# Altium PCB Module.PcbDoc (part 2 of 3)
Units mil, origin at the board's own origin, x right, y up, seen from the top; angles counter-clockwise.
Board outline 59055.12 x 27559.06 mil, 2 copper layers (Top Layer, Bottom Layer); 175 components, 152 nets, 576 pads, 116 vias.
Unrouted connection lines stored in the file: 153.
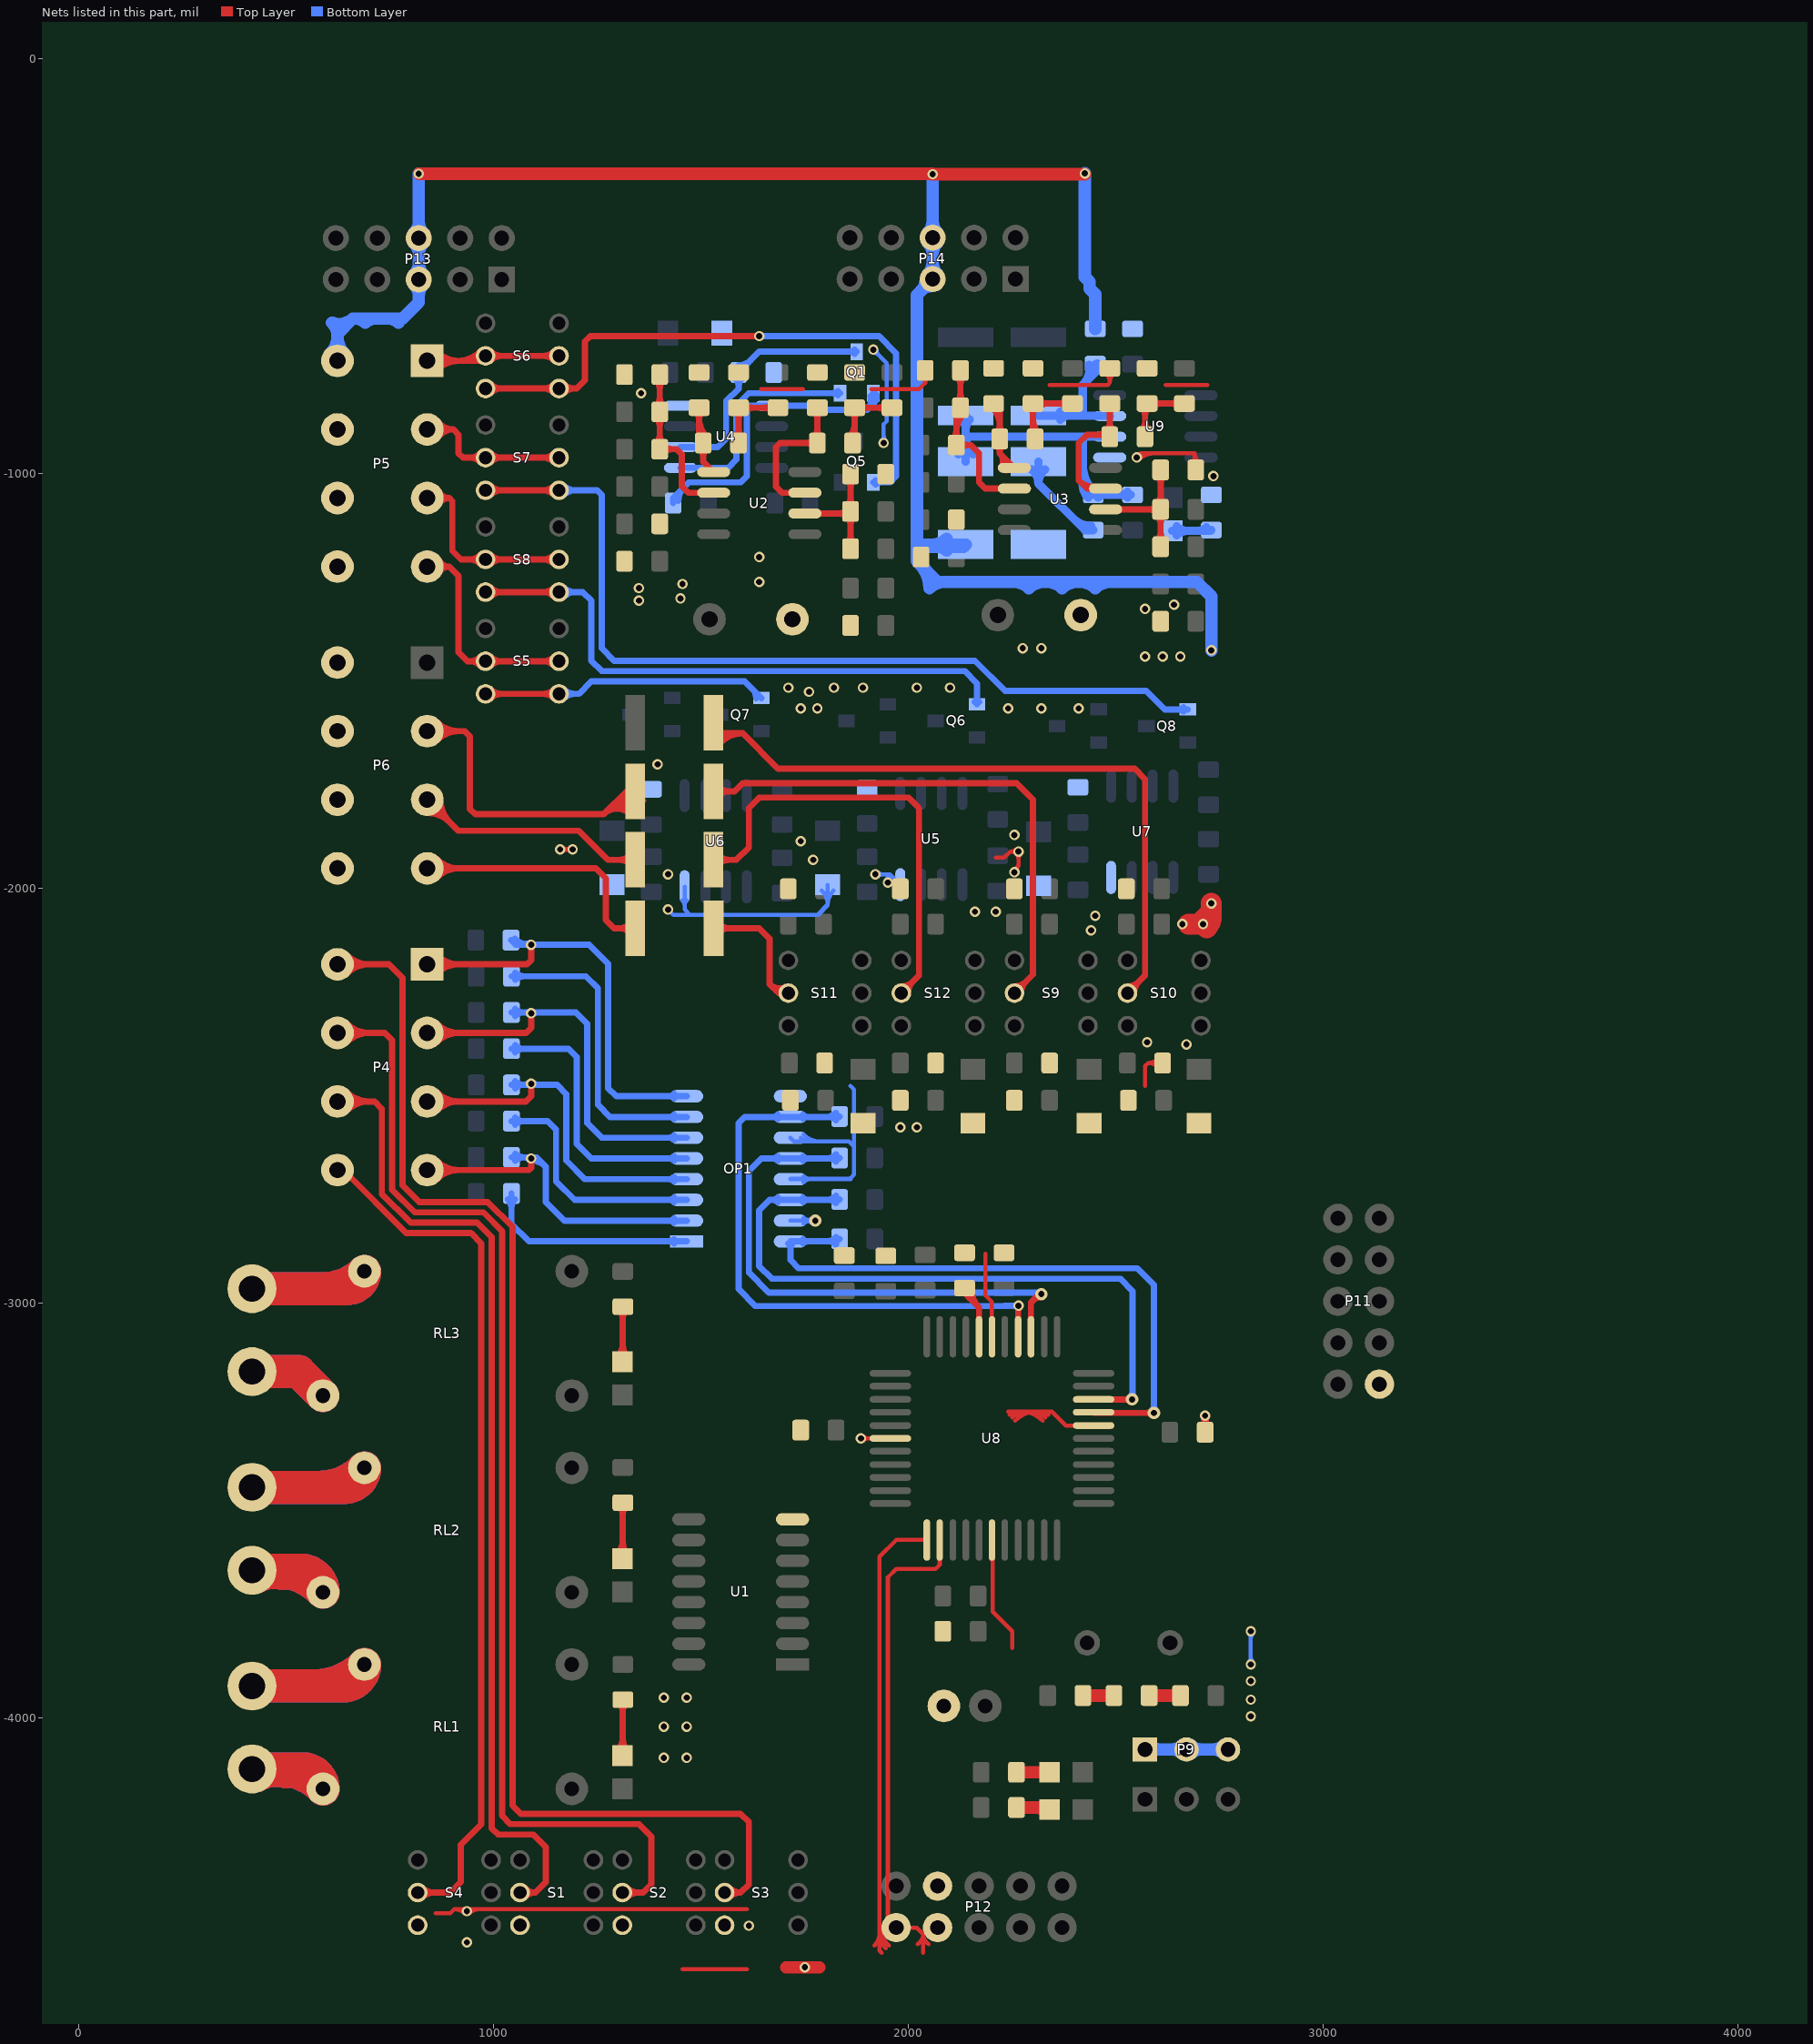
[diagram p2: the nets of this part, all layers, seen from the top]

## Via types
v1: diameter 25, hole 15, Top Layer to Bottom Layer, tented both sides, 99 vias
v2: diameter 30, hole 15, Top Layer to Bottom Layer, tented both sides, 9 vias
v3: diameter 35, hole 25, Top Layer to Bottom Layer, tented both sides, 7 vias
v4: diameter 35, hole 15, Top Layer to Bottom Layer, tented both sides, 1 vias

## Nets (pads, with @x,y where several pads share a name; then routed paths per layer and width w, separated by ;. In a path a pad name is that pad's centre, name@x,y a point inside that pad or via, vN(x,y) a via of type N, cw(c..) or ccw(c..) an arc to the next point about the centre after c; other vN are vias at no path point) (continued)
AI2: F1.1 P6.3 | length 1178.4
  Top Layer w15: P6.3@839.54,-1620.49 929.82,-1620.49 942.5,-1633.17 942.5,-1808.17 955.18,-1820.85 1264.82,-1820.85 ; P6.3@851.46,-1632.42 cw(c880.27,-1661.22) 880.27,-1620.49 cw(c880.26,-1579.77) P6.3@851.46,-1608.56 ; P6.3@862.07,-1643.03 cw(c916.48,-1697.44) 916.48,-1620.49 ; P6.3@862.07,-1597.96 ccw(c916.47,-1543.55) 916.47,-1620.49 ; 1275.54,-1810.13 cw(c1307.81,-1842.39) F1.1@1339.73,-1809.78 ; 1286.27,-1799.4 cw(c1318.42,-1831.55) F1.1@1350.22,-1799.06 ; 1296.99,-1788.68 cw(c1329.02,-1820.72) F1.1@1360.71,-1788.34 ; F1.1@1329.24,-1820.5 ccw(c1297.21,-1853.23) 1264.82,-1820.85 ; F1.1@1340.51,-1765.67 1320,-1765.67 1264.82,-1820.85
AI3: F4.1 P6.5 | length 806.9
  Top Layer w15: P6.5@839.54,-1817.72 cw(c839.54,-1894.66) 893.94,-1840.25 cw(c948.35,-1785.85) P6.5@871.41,-1785.85 ; P6.5@839.54,-1802.72 cw(c839.54,-1843.45) 868.33,-1814.65 cw(c897.13,-1785.85) P6.5@856.41,-1785.85 ; P6.5@839.54,-1785.85 914.36,-1860.67 1205,-1860.67 1275,-1930.67 F4.1@1340.51,-1930.67 ; F4.1@1329.11,-1942.07 ccw(c1301.59,-1969.59) 1301.59,-1930.67 ccw(c1301.59,-1891.75) F4.1@1329.11,-1919.27
AI4: F3.1 P6.7 | length 865.9
  Top Layer w15: P6.7@839.54,-1951.2 1245.53,-1951.2 1270,-1975.67 1270,-2075.67 1290,-2095.67 F3.1@1341.02,-2095.67 ; P6.7@851.46,-1963.13 cw(c880.26,-1991.93) 880.26,-1951.2 cw(c880.26,-1910.47) P6.7@851.46,-1939.27 ; P6.7@862.07,-1973.74 cw(c916.48,-2028.14) 916.48,-1951.2 cw(c916.48,-1874.26) P6.7@862.07,-1928.67 ; F3.1@1329.62,-2107.07 ccw(c1302.1,-2134.59) 1302.1,-2095.67 ccw(c1302.1,-2056.75) F3.1@1329.62,-2084.27
AOMA1: P5.1 S6.1 S6.4 | length 726.8
  Top Layer w15: P5.1@839.54,-727.67 968,-727.67 S6.4@980,-715.67 S6.1@1157.16,-715.67 ; P5.1@851.46,-739.6 cw(c880.26,-768.4) 880.26,-727.67 cw(c880.26,-686.94) P5.1@851.46,-715.74 ; P5.1@862.07,-750.21 cw(c916.48,-804.61) 916.48,-727.67 cw(c916.48,-650.73) P5.1@862.07,-705.13 ; 912.11,-727.67 ccw(c912.11,-647.78) S6.4@968.6,-704.27 ; 948.32,-727.67 ccw(c948.32,-683.99) S6.4@979.2,-714.88 ; S6.4@991.4,-727.07 cw(c1018.92,-754.59) 1018.92,-715.67 cw(c1018.92,-676.75) S6.4@991.4,-704.27 ; S6.1@1145.76,-727.07 ccw(c1118.24,-754.59) 1118.24,-715.67 ccw(c1118.24,-676.75) S6.1@1145.76,-704.27
AOMA2: P5.3 S7.1 S7.4 | length 641.9
  Top Layer w15: P5.3@839.54,-893.02 902.35,-893.02 ; P5.3@865.25,-911.85 cw(c902.35,-938.99) 902.35,-893.02 ; P5.3@865.25,-874.2 ccw(c902.35,-847.05) 902.35,-893.02 ; S7.4@968.6,-972.49 ccw(c941.08,-1000.01) 941.08,-961.09 ccw(c941.08,-922.17) S7.4@968.6,-949.69 ; S7.4@991.4,-972.49 cw(c1018.92,-1000.01) 1018.92,-961.09 cw(c1018.92,-922.17) S7.4@991.4,-949.69 ; S7.1@1145.77,-972.49 ccw(c1118.24,-1000.01) 1118.24,-961.09 ccw(c1118.24,-922.17) S7.1@1145.77,-949.69 ; S7.1@1157.17,-961.09 S7.4@980,-961.09 925.42,-961.09 915,-950.67 915,-905.67 902.35,-893.02
AOMA3: P5.5 S8.1 S8.4 | length 694.1
  Top Layer w15: P5.5@839.54,-1058.38 892.71,-1058.38 ; P5.5@867.64,-1073.4 cw(c892.71,-1086.8) 892.71,-1058.38 ; P5.5@867.64,-1043.36 ccw(c892.71,-1029.96) 892.71,-1058.38 ; S8.4@968.6,-1217.91 ccw(c941.08,-1245.43) 941.08,-1206.51 ccw(c941.08,-1167.59) S8.4@968.6,-1195.11 ; S8.4@991.4,-1217.91 cw(c1018.92,-1245.43) 1018.92,-1206.51 cw(c1018.92,-1167.59) S8.4@991.4,-1195.11 ; S8.1@1145.77,-1217.91 ccw(c1118.24,-1245.43) 1118.24,-1206.51 ccw(c1118.24,-1167.59) S8.1@1145.77,-1195.11 ; S8.1@1157.17,-1206.51 S8.4@980,-1206.51 920.84,-1206.51 900,-1185.67 900,-1065.67 892.71,-1058.38
AOMA4: P5.7 S5.1 S5.4 | length 766.3
  Top Layer w15: P5.7@839.54,-1223.73 893.06,-1223.73 ; P5.7@867.55,-1238.92 cw(c893.06,-1252.74) 893.06,-1223.73 ; P5.7@867.55,-1208.55 ccw(c893.06,-1194.72) 893.06,-1223.73 ; S5.4@968.6,-1463.33 ccw(c941.08,-1490.85) 941.08,-1451.93 ccw(c941.08,-1413.01) S5.4@968.6,-1440.53 ; S5.4@991.4,-1463.33 cw(c1018.92,-1490.85) 1018.92,-1451.93 cw(c1018.92,-1413.01) S5.4@991.4,-1440.53 ; S5.1@1145.77,-1463.33 ccw(c1118.24,-1490.85) 1118.24,-1451.93 ccw(c1118.24,-1413.01) S5.1@1145.77,-1440.53 ; S5.1@1157.17,-1451.93 936.26,-1451.93 915,-1430.67 915,-1245.67 893.06,-1223.73
AREF: C29.2 U8.29 | length 210.1
  Top Layer w15: C29.2@2135,-2963.17 2135,-2975.67 2170,-3010.67 ; C29.2@2137.51,-2963 ccw(c2168.83,-2965.1) 2146.63,-2987.3 ; C29.2@2152.47,-2964 ccw(c2212.64,-2968.03) 2170,-3010.67 ; U8.29@2170,-3080.67 2170,-3010.67
DI1: OP1.2 P4.7 R27.2 | length 1114.2
  Top Layer w15: P4.7@839.54,-2678.67 1085,-2678.67 1090,-2673.67 v1(1090,-2650.67) ; P4.7@851.46,-2690.6 cw(c880.26,-2719.4) 880.26,-2678.67 cw(c880.26,-2637.94) P4.7@851.46,-2666.74 ; P4.7@862.07,-2701.21 cw(c916.48,-2755.61) 916.48,-2678.67 cw(c916.48,-2601.73) P4.7@862.07,-2656.13
  Bottom Layer w15: R27.2@1042.5,-2647.95 v1@1090,-2647.95 ; R27.2@1051.34,-2656.79 cw(c1072.68,-2678.13) 1072.68,-2647.95 cw(c1072.68,-2617.78) R27.2@1051.34,-2639.12 ; 1071.37,-2647.95 cw(c1071.37,-2669.3) v1@1086.46,-2654.21 ; v1@1090,-2655.67 cw(c1090,-2703.95) 1124.14,-2669.81 ; 1102.28,-2647.95 1125,-2670.67 1125,-2755.67 1170,-2800.67 OP1.2@1465,-2800.67 ; OP1.2@1434.7,-2805.97 ccw(c1421.89,-2818.78) 1421.89,-2800.67 ccw(c1421.89,-2782.56) OP1.2@1434.7,-2795.37
DI1_1: P4.8 S4.1 | length 2156.1
  Top Layer w15: P4.8@623,-2678.67 636.93,-2678.67 788.93,-2830.67 945,-2830.67 970,-2855.67 970,-4255.67 920,-4305.67 920,-4395.67 895,-4420.67 S4.1@816.42,-4420.67 ; S4.1@827.82,-4432.07 cw(c855.34,-4459.59) 855.34,-4420.67 cw(c855.34,-4381.75) S4.1@827.82,-4409.27
DI2: OP1.4 P4.5 R24.2 | length 1190.3
  Top Layer w15: P4.5@839.54,-2513.32 1077.35,-2513.32 1090,-2500.67 v1(1090,-2470.67) ; P4.5@851.46,-2525.24 cw(c880.26,-2554.04) 880.26,-2513.32 cw(c880.26,-2472.59) P4.5@851.46,-2501.39 ; P4.5@862.07,-2535.85 cw(c916.48,-2590.26) 916.48,-2513.32 cw(c916.48,-2436.37) P4.5@862.07,-2490.78
  Bottom Layer w15: R24.2@1042.5,-2473.38 1152.71,-2473.38 1175,-2495.67 1175,-2655.67 1220,-2700.67 OP1.4@1465,-2700.67 ; R24.2@1051.34,-2482.22 cw(c1072.68,-2503.56) 1072.68,-2473.38 cw(c1072.68,-2443.2) R24.2@1051.34,-2464.54 ; 1071.38,-2473.38 ccw(c1071.38,-2452.05) v1@1086.46,-2467.13 ; v1@1093.54,-2467.13 ccw(c1108.62,-2452.05) 1108.62,-2473.38 ; OP1.4@1434.7,-2705.97 ccw(c1421.89,-2718.78) 1421.89,-2700.67 ccw(c1421.89,-2682.56) OP1.4@1434.7,-2695.37
DI2_2: P4.6 S1.1 | length 2600.2
  Top Layer w15: P4.6@623,-2513.32 712.65,-2513.32 730,-2530.67 730,-2736.38 799.29,-2805.67 960,-2805.67 995,-2840.67 995,-4265.67 1010,-4280.67 1095,-4280.67 1125,-4310.67 1125,-4395.67 1100,-4420.67 ; P4.6@634.93,-2525.24 cw(c663.73,-2554.04) 663.73,-2513.32 cw(c663.73,-2472.59) P4.6@634.93,-2501.39 ; P4.6@645.54,-2535.85 cw(c699.94,-2590.26) 699.94,-2513.32 cw(c699.94,-2436.37) P4.6@645.54,-2490.78 ; S1.1@1063.08,-4420.67 1100,-4420.67 ; S1.1@1074.91,-4431.63 cw(c1100,-4454.87) 1100,-4420.67 ; S1.1@1074.91,-4409.71 ccw(c1100,-4386.47) 1100,-4420.67
DI3: OP1.6 P4.3 R25.2 | length 1268.3
  Top Layer w15: P4.3@839.54,-2347.96 1077.71,-2347.96 1090,-2335.67 v1(1090,-2300.67) ; P4.3@851.46,-2359.89 cw(c880.26,-2388.69) 880.26,-2347.96 cw(c880.26,-2307.23) P4.3@851.46,-2336.03 ; P4.3@862.07,-2370.5 cw(c916.48,-2424.9) 916.48,-2347.96 cw(c916.48,-2271.02) P4.3@862.07,-2325.43
  Bottom Layer w15: R25.2@1042.5,-2298.81 1198.14,-2298.81 1225,-2325.67 1225,-2565.67 1260,-2600.67 OP1.6@1465,-2600.67 ; R25.2@1051.34,-2307.65 cw(c1072.68,-2328.99) 1072.68,-2298.81 cw(c1072.68,-2268.63) R25.2@1051.34,-2289.97 ; 1073.44,-2298.81 cw(c1073.44,-2317.23) v1@1086.46,-2304.21 ; v1@1093.54,-2304.21 cw(c1106.56,-2317.23) 1106.56,-2298.81 ; OP1.6@1434.7,-2605.97 ccw(c1421.89,-2618.78) 1421.89,-2600.67 ccw(c1421.89,-2582.56) OP1.6@1434.7,-2595.37
DI3_3: P4.4 S2.1 | length 3036
  Top Layer w15: P4.4@623,-2347.96 737.29,-2347.96 755,-2365.67 755,-2726.03 809.64,-2780.67 974.64,-2780.67 1020,-2826.03 1020,-4235.67 1040,-4255.67 1350,-4255.67 1380,-4285.67 1380,-4400.67 1360,-4420.67 S2.1@1309.75,-4420.67 ; P4.4@634.93,-2359.89 cw(c663.73,-2388.69) 663.73,-2347.96 cw(c663.73,-2307.23) P4.4@634.93,-2336.03 ; P4.4@645.54,-2370.5 cw(c699.94,-2424.9) 699.94,-2347.96 cw(c699.94,-2271.02) P4.4@645.54,-2325.43 ; S2.1@1321.15,-4432.07 cw(c1348.67,-4459.59) 1348.67,-4420.67 cw(c1348.67,-4381.75) S2.1@1321.15,-4409.27
DI4: OP1.8 P4.1 R26.2 | length 1312.3
  Top Layer w15: P4.1@839.54,-2182.61 1080,-2182.61 1090,-2172.61 v1(1090,-2135.67) ; P4.1@851.46,-2194.54 cw(c880.26,-2223.33) 880.26,-2182.61 cw(c880.27,-2141.88) P4.1@851.46,-2170.68 ; P4.1@862.07,-2205.14 cw(c916.47,-2259.55) 916.47,-2182.61 ; P4.1@862.07,-2160.07 ccw(c916.48,-2105.66) 916.48,-2182.61
  Bottom Layer w15: R26.2@1041.5,-2124.24 1052.93,-2135.67 v1(1090,-2135.67) 1230,-2135.67 1275.93,-2181.6 1275.93,-2481.6 1295,-2500.67 OP1.8@1465,-2500.67 ; R26.2@1050.34,-2120.4 ccw(c1087.2,-2083.54) v1@1087.2,-2135.67 ; 1076.46,-2132.79 ccw(c1080.23,-2118.74) v1@1087.5,-2131.34 ; OP1.8@1434.7,-2505.97 ccw(c1421.89,-2518.78) 1421.89,-2500.67 ccw(c1421.89,-2482.56) OP1.8@1434.7,-2495.37
DI4_4: P4.2 S3.1 | length 3420.7
  Top Layer w15: P4.2@623,-2182.61 746.94,-2182.61 780,-2215.67 780,-2715.67 820,-2755.67 985,-2755.67 1045,-2815.67 1045,-4210.67 1065,-4230.67 1595,-4230.67 1615,-4250.67 1615,-4400.67 1595,-4420.67 ; P4.2@634.93,-2194.54 cw(c663.73,-2223.33) 663.73,-2182.61 cw(c663.73,-2141.88) P4.2@634.93,-2170.68 ; P4.2@645.54,-2205.14 cw(c699.94,-2259.55) 699.94,-2182.61 cw(c699.94,-2105.66) P4.2@645.54,-2160.07 ; S3.1@1556.42,-4420.67 1595,-4420.67 ; S3.1@1567.89,-4432 cw(c1595,-4458.77) 1595,-4420.67 ; S3.1@1567.89,-4409.34 ccw(c1595,-4382.57) 1595,-4420.67
DO1: P1.2 RL1.3 | length 939.2
  Top Layer w80: P1.2@417,-4122.67 540,-4122.67 ; P1.2@426.53,-4139.17 cw(c474.55,-4222.36) 499.41,-4129.58 ; P1.2@473.64,-4122.67 cw(c473.64,-4285.03) RL1.3@588.45,-4170.22 ; RL1.3@588,-4170.67 540,-4122.67 ; RL1.3@588.63,-4170.66 ccw(c540,-4171.3) 540,-4122.67
  Bottom Layer w80: P1.2@417,-4122.67 540,-4122.67 ; P1.2@426.53,-4139.17 cw(c474.55,-4222.36) 499.41,-4129.58 ; P1.2@473.64,-4122.67 cw(c473.64,-4285.03) RL1.3@588.45,-4170.22 ; RL1.3@588,-4170.67 540,-4122.67 ; RL1.3@588.63,-4170.66 ccw(c540,-4171.3) 540,-4122.67
DO1_1: P1.1 RL1.4 | length 1025.6
  Top Layer w80: P1.1@417,-3922.67 636,-3922.67 ; 563.98,-3922.67 ccw(c563.98,-3746.65) RL1.4@688.45,-3871.12 ; RL1.4@688,-3870.67 636,-3922.67 ; RL1.4@688.63,-3870.68 cw(c636,-3870.04) 636,-3922.67
  Bottom Layer w80: P1.1@417,-3922.67 636,-3922.67 ; 563.98,-3922.67 ccw(c563.98,-3746.65) RL1.4@688.45,-3871.12 ; RL1.4@688,-3870.67 636,-3922.67 ; RL1.4@688.63,-3870.68 cw(c636,-3870.04) 636,-3922.67
DO2: P2.2 RL2.3 | length 969.1
  Top Layer w80: P2.2@417,-3643.67 535,-3643.67 ; P2.2@426.53,-3660.17 cw(c469.22,-3734.12) 491.32,-3651.64 ; P2.2@461.57,-3643.67 cw(c461.57,-3823.1) RL2.3@588.45,-3696.22 ; RL2.3@588,-3696.67 535,-3643.67 ; RL2.3@588.63,-3696.66 ccw(c535,-3697.3) 535,-3643.67
  Bottom Layer w80: P2.2@417,-3643.67 535,-3643.67 ; P2.2@426.53,-3660.17 cw(c469.22,-3734.12) 491.32,-3651.64 ; P2.2@461.57,-3643.67 cw(c461.57,-3823.1) RL2.3@588.45,-3696.22 ; RL2.3@588,-3696.67 535,-3643.67 ; RL2.3@588.63,-3696.66 ccw(c535,-3697.3) 535,-3643.67
DO2_2: P2.1 RL2.4 | length 979
  Top Layer w80: P2.1@417,-3443.67 641,-3443.67 ; 576.05,-3443.67 ccw(c576.05,-3284.72) RL2.4@688.45,-3397.12 ; RL2.4@688,-3396.67 641,-3443.67 ; RL2.4@688.63,-3396.68 cw(c641,-3396.04) 641,-3443.67
  Bottom Layer w80: P2.1@417,-3443.67 641,-3443.67 ; 576.05,-3443.67 ccw(c576.05,-3284.72) RL2.4@688.45,-3397.12 ; RL2.4@688,-3396.67 641,-3443.67 ; RL2.4@688.63,-3396.68 cw(c641,-3396.04) 641,-3443.67
DO3: P3.2 RL3.3 | length 390
  Top Layer w80: P3.2@417,-3164.67 530,-3164.67 RL3.3@588,-3222.67
  Bottom Layer w80: P3.2@417,-3164.67 530,-3164.67 RL3.3@588,-3222.67
DO3_3: P3.1 RL3.4 | length 932.3
  Top Layer w80: P3.1@417,-2964.67 646,-2964.67 ; 588.12,-2964.67 ccw(c588.12,-2822.79) RL3.4@688.45,-2923.12 ; RL3.4@688,-2922.67 646,-2964.67 ; RL3.4@688.63,-2922.68 cw(c646,-2922.04) 646,-2964.67
  Bottom Layer w80: P3.1@417,-2964.67 646,-2964.67 ; 588.12,-2964.67 ccw(c588.12,-2822.79) RL3.4@688.45,-2923.12 ; RL3.4@688,-2922.67 646,-2964.67 ; RL3.4@688.63,-2922.68 cw(c646,-2922.04) 646,-2964.67
GND: C1.2 C2.2 C3.1 C4.1 C5.2 C6.2 C7.1 C8.1 C13.1 C14.1 C15.2 C16.2 C17.2 C18.2 C19.2 C20.2 C21.2 C22.2 C23.2 C24.2 C25.2 C26.2 C28.2 C29.1 C30.1 C31.2 C32.1 C33.2 C34.1 C35.2 C36.2 C37.2 C38.2 D5.A D6.A DW1.A DW2.A DW3.A DW4.A OP1.9 OP1.11 OP1.13 OP1.15 P5.2 P5.4 P5.6 P5.8 P6.2 P6.4 P6.6 P6.8 P9.1 P9.2 P9.3 P11.1 P12.1 P13.5 P13.6 P14.5 P14.6 R12.2 R13.2 R14.2 R15.2 R48.1 R49.1 R50.1 R51.1 R54.2 R55.2 R56.2 R57.2 R58.2 R62.2 R63.2 R64.2 R65.2 R67.1 R68.1 R71.1 S1.3 S2.3 S3.3 S4.3 U1.8 U4.4 U5.4 U6.4 U7.4 U8.6 U8.18 U8.28 U8.39 U9.5 | length 12541.9
  Top Layer w10: 860,-4470.67 895,-4470.67 904.88,-4460.79 1609.88,-4460.79 1610,-4460.67 ; 905.11,-4460.79 cw(c905.11,-4495.56) v1@929.7,-4470.97 ; v1@940.3,-4470.97 cw(c964.89,-4495.56) 964.89,-4460.79 ; v1(1160,-1905.67) v1(1190,-1905.67) ; v1@1165.3,-1910.97 cw(c1178.11,-1923.78) 1178.11,-1905.67 cw(c1178.11,-1887.56) v1@1165.3,-1900.37 ; 1174.2,-1906.72 cw(c1176.58,-1915.59) v1@1183.97,-1910.13 ; 1174.2,-1904.62 ccw(c1176.58,-1895.75) v1@1183.97,-1901.21 ; v1@1184.7,-1910.97 ccw(c1171.89,-1923.78) 1171.89,-1905.67 ccw(c1171.89,-1887.56) v1@1184.7,-1900.37 ; 1455,-4605.67 1610,-4605.67 ; 1645,-795.67 1745,-795.67 ; v1(1885,-3325.67) U8.39@1956,-3325.67 ; v1@1890.3,-3330.97 cw(c1903.11,-3343.78) 1903.11,-3325.67 cw(c1903.11,-3307.56) v1@1890.3,-3320.37 ; 1910,-795.67 2025.31,-795.67 2040,-780.98 ; R15.2@2032.8,-768.83 cw(c2026.14,-780.98) 2040,-780.98 ; R15.2@2040,-750.67 2040,-780.98 ; R15.2@2047.2,-768.83 ccw(c2053.86,-780.98) 2040,-780.98 ; 2185,-2880.67 2185,-2980.87 2201,-2996.87 U8.28@2201,-3080.67 ; U8.6@2198.88,-3614.79 cw(c2190.14,-3623.53) 2202.5,-3623.53 ; U8.6@2201,-3570.67 2202.5,-3572.17 2202.5,-3743.17 2250,-3790.67 2250,-3830.67 ; 2210,-1925.67 2230,-1925.67 2245,-1910.67 v1(2265,-1910.67) 2265,-1944.7 ; 2240,-3260.67 2345,-3260.67 2379,-3294.67 U8.18@2446,-3294.67 ; 2242.93,-3268.6 cw(c2262.07,-3287.74) 2262.07,-3260.67 ; 2250,-3275.67 cw(c2286.21,-3311.88) 2286.21,-3260.67 ; v1(2255,-1960.67) 2255,-1954.7 2265,-1944.7 ; 2257.07,-3282.74 cw(c2310.36,-3336.03) 2310.36,-3260.67 ; v1@2259.7,-1905.37 cw(c2246.89,-1892.56) 2246.89,-1910.67 cw(c2246.89,-1928.78) 2259.7,-1915.97 cw(c2246.89,-1928.78) 2265,-1928.78 cw(c2283.11,-1928.78) v1@2270.3,-1915.97 ; v1@2262.04,-1958.09 cw(c2274.01,-1953.71) 2265,-1944.7 ; 2269.64,-3260.67 cw(c2269.64,-3336.03) 2322.93,-3282.74 ; 2293.79,-3260.67 cw(c2293.79,-3311.88) 2330,-3275.67 ; 2317.93,-3260.67 cw(c2317.93,-3287.74) 2337.07,-3268.6 ; 2340,-785.67 2480.31,-785.67 2485,-780.98 ; C8.1@2474.59,-756.47 cw(c2450.94,-780.98) 2485,-780.98 ; C8.1@2485,-745.67 2485,-780.98 ; C8.1@2495.41,-756.47 ccw(c2519.06,-780.98) 2485,-780.98 ; v1@2548.23,-958.9 cw(c2568.11,-978.78) 2568.11,-950.67 ; v1(2550,-960.67) 2560,-950.67 ; v1@2551.42,-953.3 ccw(c2553.22,-943.89) 2560,-950.67 ; v1@2555.3,-965.97 cw(c2592.25,-1002.92) 2592.25,-950.67 ; v1@2557.37,-959.25 cw(c2566.78,-957.45) 2560,-950.67 ; 2570,-2475.67 2570,-2427.86 2577.19,-2420.67 ; R57.2@2601.7,-2431.08 ccw(c2577.19,-2454.73) 2577.19,-2420.67 ; R57.2@2601.7,-2410.26 cw(c2577.19,-2386.61) 2577.19,-2420.67 ; R57.2@2612.5,-2420.67 2577.19,-2420.67 ; 2620,-785.67 2720,-785.67 ; R14.2@2682,-975.06 ccw(c2662.68,-955.74) 2690,-955.74 ; R14.2@2692.6,-990.67 2690,-988.07 2690,-950.67 ; R14.2@2701.55,-973.63 cw(c2718.59,-950.67) 2690,-950.67 ; C32.1@2704.66,-3294.81 ccw(c2681.67,-3270.67) v1(2715,-3270.67) ; v1@2708.64,-3274.64 cw(c2694.99,-3283.17) 2710.53,-3287.34 cw(c2726.08,-3291.5) v1@2718.52,-3277.29 ; v1@2709.7,-3275.97 cw(c2696.89,-3288.78) 2715,-3288.78 cw(c2733.11,-3288.78) v1@2720.3,-3275.97 ; v1@2711.48,-3277.29 cw(c2703.92,-3291.5) 2719.46,-3287.34 cw(c2735.01,-3283.17) v1@2721.36,-3274.64 ; C32.1@2715,-3310.67 v1(2715,-3270.67) ; C32.1@2725.34,-3294.81 cw(c2748.33,-3270.67) v1(2715,-3270.67) ; 2560,-950.67 2690,-950.67
  Top Layer w30: v1@820,-276.67 v1@2058,-276.67 ; 1705,-4600.67 v1(1750,-4600.67) 1785,-4600.67 ; v1(2058,-277.67) v1@2425,-277.67 ; R58.2@2580,-3945.67 2580.09,-3945.76 C28.2@2655.5,-3945.76
  Top Layer w50: 2675,-2085.67 2700,-2085.67 2730,-2055.67 v1(2730,-2035.67) ; 2718.84,-2094.51 ccw(c2691.89,-2067.56) 2730,-2067.56 cw(c2691.89,-2067.56) 2718.84,-2094.51
  Bottom Layer w10: v1(1420,-2050.67) 1432.5,-2063.17 1472.5,-2063.17 ; U6.4@1455.05,-2028.62 cw(c1443.1,-2040.57) 1460,-2040.57 cw(c1476.9,-2040.57) U6.4@1464.95,-2028.62 ; U6.4@1460,-1995.67 1460,-2050.67 1472.5,-2063.17 ; OP1.15@1715,-2800.67 v2(1775,-2800.67) ; OP1.11@1715,-2600.67 1723.91,-2609.58 1856.24,-2609.58 1868.54,-2621.88 ; OP1.11@1740,-2600.67 ccw(c1761.52,-2579.16) 1761.52,-2609.58 ; OP1.15@1747.07,-2807.74 cw(c1764.14,-2824.81) 1764.14,-2800.67 cw(c1764.14,-2776.53) OP1.15@1747.07,-2793.6 ; OP1.11@1747.07,-2593.6 ccw(c1785.66,-2555.01) 1785.66,-2609.58 ; 1756.77,-2802.65 cw(c1759.16,-2811.55) v2@1766.76,-2806.33 ; 1756.77,-2798.7 ccw(c1759.16,-2789.8) v2@1766.76,-2795.01 ; 1757.51,-2802.45 ccw(c1753.74,-2788.4) v2@1766.34,-2795.67 ; 1757.51,-2798.89 cw(c1753.74,-2812.94) v2@1766.34,-2805.67 ; 1761.52,-2699.58 cw(c1761.52,-2679.15) 1747.07,-2693.6 ccw(c1764.14,-2676.53) 1764.14,-2700.67 ccw(c1764.14,-2724.81) 1747.07,-2707.74 cw(c1766.77,-2727.44) 1766.77,-2699.58 ; v2@1767.93,-2807.74 ccw(c1750.86,-2824.81) 1750.86,-2800.67 ccw(c1750.86,-2776.53) v2@1767.93,-2793.6 ; C22.2@1790.86,-2004.81 cw(c1756.72,-2038.95) 1805,-2038.95 cw(c1853.28,-2038.95) C22.2@1819.14,-2004.81 ; 1803.75,-2039.42 1780,-2063.17 ; C22.2@1805,-1990.67 1805,-2040.67 1782.5,-2063.17 1780,-2063.17 ; 1860,-2475.67 1868.54,-2484.21 1868.54,-2621.88 ; 1860.38,-2700.67 OP1.13@1715,-2700.67 1716.09,-2699.58 1860.38,-2699.58 1860.38,-2697.74 1868.54,-2689.58 1868.54,-2621.88 ; v1@1915,-708.17 cw(c1915,-726.28) 1927.8,-713.47 cw(c1940.61,-700.67) v1@1922.5,-700.67 ; v1(1915,-700.67) 1947.5,-733.17 1947.5,-873.17 1940,-880.67 v1(1940,-925.67) ; v1(1920,-1965.67) 1945,-1965.67 ; v1@1925.3,-1970.97 cw(c1938.11,-1983.78) 1938.11,-1965.67 cw(c1938.11,-1947.56) v1@1925.3,-1960.37 ; v1@1934.7,-920.37 ccw(c1921.89,-907.56) 1940,-907.56 ccw(c1958.11,-907.56) v1@1945.3,-920.37 ; v1@1945.5,-1979.67 ccw(c1938.75,-1970.67) 1950,-1970.67 ; v1(1950,-1985.67) 1950,-1970.67 ; v1@1954.5,-1979.67 cw(c1961.25,-1970.67) 1950,-1970.67 ; U5.4@1980,-1990.67 1955,-1965.67 1945,-1965.67 ; v1(2255,-1960.67) cw(c2255,-1965.67) v1@2260,-1965.67 ; v1@2819.7,-3865.37 ccw(c2806.89,-3852.56) 2825,-3852.56 ccw(c2843.11,-3852.56) v1@2830.3,-3865.37 ; v1@2819.7,-3795.97 cw(c2806.89,-3808.78) 2825,-3808.78 cw(c2843.11,-3808.78) v1@2830.3,-3795.97 ; v1(2825,-3870.67) v1(2825,-3790.67) ; 1472.5,-2063.17 1780,-2063.17 ; 1945,-1965.67 1950,-1970.67
  Bottom Layer w30: P5.2@605.77,-710.44 ccw(c564.17,-668.84) 623,-668.84 ccw(c681.83,-668.84) P5.2@640.23,-710.44 ; P5.2@623,-727.67 623,-662.67 660,-625.67 ; 623,-667.05 ccw(c578.62,-667.05) 610,-635.67 ; 623,-665.64 ccw(c581.96,-665.64) 610,-635.67 ; 665.86,-625.67 cw(c665.86,-659.81) 690,-635.67 cw(c714.14,-659.81) 714.14,-625.67 ; 745.86,-625.67 cw(c745.86,-659.81) 770,-635.67 ; P13.5@807.34,-543.33 cw(c779.18,-571.49) 819,-571.49 cw(c858.82,-571.49) P13.5@830.66,-543.33 ; P13.5@807.34,-520.01 ccw(c779.18,-491.85) 819,-491.85 ccw(c858.82,-491.85) P13.5@830.66,-520.01 ; P13.6@807.34,-443.33 cw(c779.18,-471.49) 819,-471.49 cw(c858.82,-471.49) P13.6@830.66,-443.33 ; P13.6@807.34,-420.01 ccw(c779.18,-391.85) 819,-391.85 ccw(c858.82,-391.85) P13.6@830.66,-420.01 ; v1(819,-276.67) P13.6@819,-431.67 P13.5@819,-531.67 819,-586.67 780,-625.67 660,-625.67 ; 2025.25,-1215.92 cw(c1965.5,-1275.67) 2050,-1275.67 ; P14.5@2041.5,-530.67 cw(c2001.68,-530.67) 2029.84,-558.83 cw(c2058,-586.99) P14.5@2058,-547.17 ; 2045.61,-1175.67 ccw(c2045.61,-1110.31) 2091.83,-1156.53 cw(c2057.68,-1122.39) 2057.68,-1170.67 cw(c2057.68,-1218.95) 2091.83,-1184.81 ccw(c2069.76,-1206.88) 2069.76,-1175.67 ; P14.5@2046.34,-519.01 ccw(c2018.18,-490.85) 2058,-490.85 ccw(c2097.82,-490.85) P14.5@2069.66,-519.01 ; P14.6@2046.34,-442.33 cw(c2018.18,-470.49) 2058,-470.49 cw(c2097.82,-470.49) P14.6@2069.66,-442.33 ; P14.6@2046.34,-419.01 ccw(c2018.18,-390.85) 2058,-390.85 ccw(c2097.82,-390.85) P14.6@2069.66,-419.01 ; v1(2058,-277.67) P14.6@2058,-430.67 P14.5@2058,-530.67 2020,-568.67 2020,-1175.67 ; 2086.21,-1260.67 ccw(c2086.21,-1311.88) 2050,-1275.67 ; 2253.79,-1260.67 cw(c2253.79,-1311.88) 2290,-1275.67 cw(c2326.21,-1311.88) 2326.21,-1260.67 ; 2333.79,-1260.67 cw(c2333.79,-1311.88) 2370,-1275.67 cw(c2406.21,-1311.88) 2406.21,-1260.67 ; 2413.79,-1260.67 cw(c2413.79,-1311.88) 2450,-1275.67 cw(c2486.21,-1311.88) 2486.21,-1260.67 ; v1(2425,-275.67) 2425,-525.67 2436,-536.67 2436,-553.24 2450,-567.24 R71.1@2450,-650.67 ; P9.1@2570,-4075.67 P9.2@2670,-4075.67 P9.3@2770,-4075.67 ; P9.1@2580.27,-4085.94 cw(c2605.07,-4110.74) 2605.07,-4075.67 cw(c2605.07,-4040.6) P9.1@2580.27,-4065.4 ; P9.2@2659.73,-4085.94 ccw(c2634.93,-4110.74) 2634.93,-4075.67 ccw(c2634.93,-4040.6) P9.2@2659.73,-4065.4 ; P9.2@2680.27,-4085.94 cw(c2705.07,-4110.74) 2705.07,-4075.67 cw(c2705.07,-4040.6) P9.2@2680.27,-4065.4 ; v1(2730,-1425.67) 2730,-1295.67 2695,-1260.67 2070,-1260.67 ; P9.3@2759.73,-4085.94 ccw(c2734.93,-4110.74) 2734.93,-4075.67 ccw(c2734.93,-4040.6) P9.3@2759.73,-4065.4 ; 610,-635.67 ccw(c627.5,-593.17) 660,-625.67 ; 2020,-1175.67 2025,-1170.67 D6.A@2137.9,-1170.67 2132.9,-1175.67 2020,-1175.67 ; 2020,-1175.67 2020,-1210.67 2070,-1260.67 ; 2050,-1275.67 cw(c2070,-1281.5) 2070,-1260.67
  other v1: 935,-4540.67 1615,-4500.67 935,-4465.67 1410,-4095.67 1465,-4095.67 1410,-4020.67 1465,-4020.67 2825,-3995.67 2825,-3955.67 1410,-3950.67 1465,-3950.67 2825,-3910.67 1980,-2575.67 2020,-2575.67 2670,-2375.67 2575,-2370.67 2440,-2100.67 2660,-2085.67 2710,-2085.67 2450,-2065.67 2160,-2055.67 2210,-2055.67 1420,-1965.67 1770,-1930.67 1740,-1885.67 2255,-1870.67 1395,-1700.67 1740,-1565.67 1780,-1565.67 2240,-1565.67 2320,-1565.67 2410,-1565.67 1760,-1525.67 1710,-1515.67 1820,-1515.67 1890,-1515.67 2020,-1515.67 2100,-1515.67 2570.24,-1440.67 2612.62,-1440.67 2655,-1440.67 2275,-1420.67 2320,-1420.67 2570,-1325.67 2640,-1315.67 1350,-1305.67 1450,-1300.67 1350,-1275.67 1455,-1265.67 1640,-1260.67 1640,-1200.67 2735,-1005.67 1355,-805.67
INPUT1: OP1.16 R35.1 U8.19 | length 1683.2
  Top Layer w15: U8.19@2446,-3262.67 2447.5,-3264.17 v2(2591.5,-3264.17) ; v2@2586.2,-3269.47 ccw(c2573.39,-3282.28) 2573.39,-3264.17 ccw(c2573.39,-3246.06) v2@2586.2,-3258.87
  Bottom Layer w15: OP1.16@1709.7,-2855.97 cw(c1696.89,-2868.78) 1715,-2868.78 cw(c1733.11,-2868.78) OP1.16@1720.3,-2855.97 ; OP1.16@1745.3,-2855.97 cw(c1758.11,-2868.78) 1758.11,-2850.67 cw(c1758.11,-2832.56) OP1.16@1745.3,-2845.37 ; 1800.74,-2850.67 ccw(c1800.74,-2816.78) R35.1@1824.71,-2840.74 ; 1805.99,-2850.67 cw(c1805.99,-2877.13) R35.1@1824.71,-2858.42 ; R35.1@1833.54,-2844.58 1827.46,-2850.67 OP1.16@1715,-2850.67 1715,-2895.67 1735,-2915.67 2551.5,-2915.67 2591.5,-2955.67 v2(2591.5,-3264.17) ; v2@2586.2,-3258.87 ccw(c2573.39,-3246.06) 2591.5,-3246.06 ccw(c2609.61,-3246.06) v2@2596.8,-3258.87
INPUT2: OP1.14 R32.1 U8.20 | length 1779.8
  Top Layer w15: U8.20@2446,-3231.67 v2(2539,-3231.67) ; v2@2533.7,-3236.97 ccw(c2520.89,-3249.78) 2520.89,-3231.67 ccw(c2520.89,-3213.56) v2@2533.7,-3226.37
  Bottom Layer w15: OP1.14@1684.7,-2755.97 ccw(c1671.89,-2768.78) 1671.89,-2750.67 ccw(c1671.89,-2732.56) OP1.14@1684.7,-2745.37 ; OP1.14@1745.3,-2755.97 cw(c1758.11,-2768.78) 1758.11,-2750.67 cw(c1758.11,-2732.56) OP1.14@1745.3,-2745.37 ; 1800.74,-2750.67 ccw(c1800.74,-2716.78) R32.1@1824.7,-2740.74 ; 1805.99,-2750.67 cw(c1805.99,-2777.13) R32.1@1824.7,-2758.42 ; R32.1@1833.54,-2749.58 1832.45,-2750.67 OP1.14@1715,-2750.67 1665,-2750.67 1640,-2775.67 1640,-2910.67 1670,-2940.67 2510,-2940.67 2540,-2970.67 2540,-3230.67 v2(2539,-3231.67) ; v2@2533.7,-3226.37 ccw(c2518.48,-3211.15) 2540,-3211.15 ; 2540,-3215.98 ccw(c2554.69,-3215.98) v2@2544.3,-3226.37
INPUT3: OP1.12 R33.1 U8.25 | length 1477.6
  Top Layer w15: U8.25@2295,-3080.67 2295,-2997.75 v2@2319.92,-2972.83 ; 2298.59,-2994.17 cw(c2319.92,-3015.5) v2@2319.92,-2985.33
  Bottom Layer w15: OP1.12@1684.7,-2655.97 ccw(c1671.89,-2668.78) 1671.89,-2650.67 ccw(c1671.89,-2632.56) OP1.12@1684.7,-2645.37 ; OP1.12@1745.3,-2655.97 cw(c1758.11,-2668.78) 1758.11,-2650.67 cw(c1758.11,-2632.56) OP1.12@1745.3,-2645.37 ; 1800.74,-2650.67 ccw(c1800.74,-2616.78) R33.1@1824.71,-2640.74 ; 1805.99,-2650.67 cw(c1805.99,-2677.13) R33.1@1824.71,-2658.42 ; R33.1@1833.54,-2649.58 1832.46,-2650.67 OP1.12@1715,-2650.67 1645,-2650.67 1615,-2680.67 1615,-2926.03 1663.14,-2974.17 v2@2316.27,-2974.17 ; 2292.99,-2974.17 cw(c2292.99,-3004.76) v2@2314.62,-2983.13 ; v2(2319.92,-2977.83) v2@2316.27,-2974.17 ; v2@2319.92,-2972.83 2318.58,-2974.17 v2@2316.27,-2974.17
INPUT4: OP1.10 R34.1 U8.26 | length 1533.1
  Top Layer w15: U8.26@2264,-3080.67 v1@2264,-3006.67 ; 2264,-3020.15 cw(c2279.48,-3020.15) v1@2268.54,-3009.21
  Bottom Layer w15: OP1.10@1684.7,-2555.97 ccw(c1671.89,-2568.78) 1671.89,-2550.67 ccw(c1671.89,-2532.56) OP1.10@1684.7,-2545.37 ; OP1.10@1745.3,-2555.97 cw(c1758.11,-2568.78) 1758.11,-2550.67 cw(c1758.11,-2532.56) OP1.10@1745.3,-2545.37 ; 1800.74,-2550.67 ccw(c1800.74,-2516.78) R34.1@1824.71,-2540.74 ; 1805.99,-2550.67 cw(c1805.99,-2577.13) R34.1@1824.71,-2558.42 ; R34.1@1833.54,-2549.58 1832.46,-2550.67 OP1.10@1715,-2550.67 1605,-2550.67 1590,-2565.67 1590,-2965.67 1631,-3006.67 2230,-3006.67 2231,-3005.67 v1(2265,-3005.67)
MAOUT1: Q5.1 S6.2 S6.5 | length 1683.6
  Top Layer w15: S6.5@980,-794.41 S6.2@1157.16,-794.41 1200,-794.41 1220,-774.41 1220,-680.67 1232.5,-668.17 v1(1640,-668.17) ; S6.5@991.4,-805.81 cw(c1018.92,-833.33) 1018.92,-794.41 cw(c1018.92,-755.49) S6.5@991.4,-783.01 ; S6.2@1145.76,-805.81 ccw(c1118.24,-833.33) 1118.24,-794.41 ccw(c1118.24,-755.49) S6.2@1145.76,-783.01 ; S6.2@1168.56,-805.81 cw(c1196.09,-833.33) 1196.09,-794.41 cw(c1196.09,-755.49) S6.2@1168.56,-783.01
  Bottom Layer w15: v1(1640,-668.17) 1928.75,-668.17 1970,-709.42 1970,-1005.67 1955,-1020.67 Q5.1@1915,-1020.67 ; Q5.1@1920.3,-1025.97 cw(c1933.11,-1038.78) 1933.11,-1020.67 cw(c1933.11,-1002.56) Q5.1@1920.3,-1015.37
MAOUT2: Q8.1 S7.2 S7.5 | length 2340.7
  Top Layer w15: S7.5@980,-1039.83 S7.2@1157.17,-1039.83 ; S7.5@991.4,-1051.23 cw(c1018.92,-1078.75) 1018.92,-1039.83 cw(c1018.92,-1000.91) S7.5@991.4,-1028.43 ; S7.2@1145.77,-1051.23 ccw(c1118.24,-1078.75) 1118.24,-1039.83 ccw(c1118.24,-1000.91) S7.2@1145.77,-1028.43
  Bottom Layer w15: S7.2@1157.17,-1039.83 1249.16,-1039.83 1260,-1050.67 1260,-1420.67 1290,-1450.67 2160,-1450.67 2232.5,-1523.17 2572.5,-1523.17 2617.5,-1568.17 Q8.1@2673.21,-1568.17 ; S7.2@1168.57,-1051.23 cw(c1196.09,-1078.75) 1196.09,-1039.83 cw(c1196.09,-1000.91) S7.2@1168.57,-1028.43 ; Q8.1@2662.91,-1573.47 ccw(c2650.1,-1586.28) 2650.1,-1568.17 ccw(c2650.1,-1550.06) Q8.1@2662.91,-1562.87
MAOUT3: Q6.1 S8.2 S8.5 | length 1623.1
  Top Layer w15: S8.5@980,-1285.25 S8.2@1157.17,-1285.25 ; S8.5@991.4,-1296.65 cw(c1018.92,-1324.17) 1018.92,-1285.25 cw(c1018.92,-1246.33) S8.5@991.4,-1273.85 ; S8.2@1145.77,-1296.65 ccw(c1118.24,-1324.17) 1118.24,-1285.25 ccw(c1118.24,-1246.33) S8.2@1145.77,-1273.85
  Bottom Layer w15: S8.2@1157.17,-1285.25 1214.58,-1285.25 1235,-1305.67 1235,-1450.67 1260,-1475.67 2135,-1475.67 2165,-1505.67 Q6.1@2165,-1555.67 ; S8.2@1168.57,-1296.65 cw(c1196.09,-1324.17) 1196.09,-1285.25 cw(c1196.09,-1246.33) S8.2@1168.57,-1273.85 ; Q6.1@2159.7,-1550.37 ccw(c2146.89,-1537.56) 2165,-1537.56 ccw(c2183.11,-1537.56) Q6.1@2170.3,-1550.37
MAOUT4: Q7.1 S5.2 S5.5 | length 901.1
  Top Layer w15: S5.5@980,-1530.67 S5.2@1157.17,-1530.67 ; S5.5@991.4,-1542.07 cw(c1018.92,-1569.59) 1018.92,-1530.67 cw(c1018.92,-1491.75) S5.5@991.4,-1519.27 ; S5.2@1145.77,-1542.07 ccw(c1118.24,-1569.59) 1118.24,-1530.67 ccw(c1118.24,-1491.75) S5.2@1145.77,-1519.27
  Bottom Layer w15: S5.2@1157.17,-1530.67 1205,-1530.67 1235,-1500.67 1605,-1500.67 Q7.1@1645,-1540.67 ; S5.2@1168.57,-1542.07 cw(c1196.09,-1569.59) 1196.09,-1530.67 cw(c1196.09,-1491.75) S5.2@1168.57,-1519.27 ; 1623.66,-1519.33 cw(c1602.32,-1540.67) Q7.1@1632.5,-1540.67
MISO: P12.4 U8.2 | length 1224.8
  Top Layer w10: 2021.71,-4545.06 ccw(c2005.99,-4520.67) 2035,-4520.67 ; 2035,-4565.67 2035,-4520.67 ; 2048.29,-4545.06 cw(c2064.01,-4520.67) 2035,-4520.67 ; U8.2@2075,-3570.67 2075,-3630.67 2065,-3640.67 1970,-3640.67 1950,-3660.67 1950,-4485.67 1970,-4505.67 2020,-4505.67 2035,-4520.67
MOSI: P12.3 U8.1 | length 1221.6
  Top Layer w10: 1917.66,-4548.33 ccw(c1887.86,-4518.53) 1930,-4518.53 ccw(c1982.14,-4518.53) 1945.27,-4555.4 ; 1930,-4494.38 ccw(c2006.29,-4494.38) 1952.34,-4548.33 ; 1935,-4565.67 1930,-4560.67 1930,-3610.67 1970,-3570.67 U8.1@2044,-3570.67
NetC1_1: C1.1 R2.1 R9.2 | length 369.6
  Top Layer w15: R9.2@1581.16,-911.83 ccw(c1559.82,-890.49) 1590,-890.49 ccw(c1620.18,-890.49) R9.2@1598.84,-911.83 ; C1.1@1581.16,-849.51 cw(c1559.82,-870.85) 1590,-870.85 cw(c1620.18,-870.85) C1.1@1598.84,-849.51 ; R9.2@1590,-925.67 C1.1@1590,-840.67 R2.1@1685,-840.67 ; C1.1@1603.84,-849.51 cw(c1625.18,-870.85) 1625.18,-840.67 cw(c1625.18,-810.49) C1.1@1603.84,-831.83 ; R2.1@1671.16,-849.51 ccw(c1649.82,-870.85) 1649.82,-840.67 ccw(c1649.82,-810.49) R2.1@1671.16,-831.83
NetC2_1: C2.1 R4.1 R11.2 | length 361.4
  Top Layer w15: C2.1@2291.16,-839.51 cw(c2269.82,-860.85) 2300,-860.85 cw(c2330.18,-860.85) C2.1@2308.84,-839.51 ; 2300,-868.42 ccw(c2347.25,-868.42) R11.2@2313.84,-901.83 ; R11.2@2305,-915.67 2300,-910.67 C2.1@2300,-830.67 R4.1@2395,-830.67 ; C2.1@2313.84,-839.51 cw(c2335.18,-860.85) 2335.18,-830.67 cw(c2335.18,-800.49) C2.1@2313.84,-821.83 ; R4.1@2381.16,-839.51 ccw(c2359.82,-860.85) 2359.82,-830.67 ccw(c2359.82,-800.49) R4.1@2381.16,-821.83
NetC3_2: C3.2 R1.1 R8.2 | length 356.4
  Top Layer w15: R8.2@1856.16,-911.83 ccw(c1822.75,-878.42) 1870,-878.42 ; C3.2@1861.16,-849.51 cw(c1839.82,-870.85) 1870,-870.85 cw(c1900.18,-870.85) C3.2@1878.84,-849.51 ; R8.2@1865,-925.67 1870,-920.67 C3.2@1870,-840.67 R1.1@1960,-840.67 ; C3.2@1883.84,-849.51 cw(c1905.18,-870.85) 1905.18,-840.67 cw(c1905.18,-810.49) C3.2@1883.84,-831.83 ; R1.1@1946.16,-849.51 ccw(c1924.82,-870.85) 1924.82,-840.67 ccw(c1924.82,-810.49) R1.1@1946.16,-831.83
NetC4_2: C4.2 R3.1 R10.2 | length 361.7
  Top Layer w15: R10.2@2561.16,-896.83 ccw(c2539.82,-875.49) 2570,-875.49 ccw(c2600.18,-875.49) R10.2@2578.84,-896.83 ; C4.2@2561.16,-839.51 cw(c2539.82,-860.85) 2570,-860.85 cw(c2600.18,-860.85) C4.2@2578.84,-839.51 ; R10.2@2570,-910.67 2570,-835.67 C4.2@2575,-830.67 R3.1@2665,-830.67 ; C4.2@2588.84,-839.51 cw(c2610.18,-860.85) 2610.18,-830.67 cw(c2610.18,-800.49) C4.2@2588.84,-821.83 ; R3.1@2651.16,-839.51 ccw(c2629.82,-860.85) 2629.82,-830.67 ccw(c2629.82,-800.49) R3.1@2651.16,-821.83
NetC5_1: C5.1 R9.1 U2.5 | length 336.9
  Top Layer w15: C5.1@1486.16,-849.51 cw(c1464.82,-870.85) 1495,-870.85 cw(c1525.18,-870.85) C5.1@1503.84,-849.51 ; R9.1@1495,-902.56 ccw(c1523.11,-902.56) R9.1@1503.23,-922.44 ; 1495,-866.35 ccw(c1559.32,-866.35) R9.1@1513.84,-911.83 ; C5.1@1495,-840.67 1495,-915.67 R9.1@1505,-925.67 1505,-970.67 U2.5@1530,-995.67 ; R9.1@1496.16,-939.51 cw(c1474.82,-960.85) 1505,-960.85 cw(c1535.18,-960.85) R9.1@1513.84,-939.51
NetC6_1: C6.1 R11.1 U3.5 | length 408.4
  Top Layer w15: C6.1@2201.16,-839.51 cw(c2155.68,-884.99) 2220,-884.99 ; C6.1@2205,-830.67 2220,-845.67 R11.1@2220,-915.67 2220,-950.67 ; R11.1@2211.16,-901.83 ccw(c2189.82,-880.49) 2220,-880.49 ccw(c2250.18,-880.49) R11.1@2228.84,-901.83 ; R11.1@2211.2,-929.55 cw(c2190.25,-950.67) 2220,-950.67 ; C6.1@2211.77,-828.9 cw(c2191.89,-848.78) C6.1@2220,-848.78 ; U3.5@2223.25,-983.18 ccw(c2201.76,-968.91) 2220,-950.67 ; R11.1@2228.8,-929.55 ccw(c2249.75,-950.67) 2220,-950.67 ; 2232.96,-963.63 cw(c2217.34,-979.26) U3.5@2235.75,-991.48 ; U3.5@2255,-985.67 2220,-950.67
NetC7_2: C7.2 R8.1 U2.3 | length 502.6
  Top Layer w15: U2.3@1750,-1045.67 1695,-1045.67 1680,-1030.67 1680,-935.67 1690,-925.67 R8.1@1780,-925.67 C7.2@1780,-840.67 ; R8.1@1771.16,-934.51 ccw(c1749.82,-955.85) 1749.82,-925.67 ccw(c1749.82,-895.49) R8.1@1771.16,-916.83 ; R8.1@1771.16,-911.83 ccw(c1749.82,-890.49) 1780,-890.49 ccw(c1810.18,-890.49) R8.1@1788.84,-911.83 ; C7.2@1771.16,-849.51 cw(c1749.82,-870.85) 1780,-870.85 cw(c1810.18,-870.85) C7.2@1788.84,-849.51
NetC8_2: C8.2 R10.1 U3.3 | length 509.5
  Top Layer w15: 2410.3,-1015.97 ccw(c2447,-979.26) U3.3@2447,-1031.17 ; U3.3@2475,-1035.67 2430,-1035.67 2410,-1015.67 2410,-925.67 2430,-905.67 R10.1@2485,-905.67 ; R10.1@2476.16,-914.51 ccw(c2454.82,-935.85) 2454.82,-905.67 ccw(c2454.82,-875.49) 2476.16,-896.83 ccw(c2454.82,-875.49) 2485,-875.49 ccw(c2515.18,-875.49) R10.1@2493.84,-896.83 ; C8.2@2476.16,-839.51 cw(c2454.82,-860.85) 2485,-860.85 cw(c2515.18,-860.85) C8.2@2493.84,-839.51 ; R10.1@2485,-910.67 R10.1@2485,-905.67 ; C8.2@2485,-830.67 R10.1@2485,-905.67
NetC9_1: C9.1 R12.1 R16.2 U2.2 | length 529.1
  Top Layer w15: U2.2@1750,-1095.67 1855,-1095.67 R16.2@1860,-1090.67 ; C9.1@1851.16,-1166.83 ccw(c1829.82,-1145.49) 1860,-1145.49 ccw(c1890.18,-1145.49) C9.1@1868.84,-1166.83 ; R16.2@1851.16,-1086.83 cw(c1829.82,-1065.49) 1829.82,-1095.67 cw(c1829.82,-1125.85) 1851.16,-1104.51 cw(c1829.82,-1125.85) 1860,-1125.85 cw(c1890.18,-1125.85) R16.2@1868.84,-1104.51 ; R16.2@1851.16,-1076.83 ccw(c1829.82,-1055.49) 1860,-1055.49 ccw(c1890.18,-1055.49) R16.2@1868.84,-1076.83 ; R12.1@1851.16,-1014.51 cw(c1829.82,-1035.85) 1860,-1035.85 cw(c1890.18,-1035.85) R12.1@1868.84,-1014.51 ; C9.1@1860,-1180.67 R16.2@1860,-1090.67 ; R12.1@1860,-1000.67 R16.2@1860,-1090.67
NetC10_1: C10.1 R13.1 R18.2 U2.6 | length 635.6
  Top Layer w15: C10.1@1391.16,-926.83 ccw(c1369.82,-905.49) 1400,-905.49 ccw(c1430.18,-905.49) C10.1@1408.84,-926.83 ; R18.2@1391.16,-864.51 cw(c1369.82,-885.85) 1400,-885.85 cw(c1430.18,-885.85) R18.2@1408.84,-864.51 ; R18.2@1391.16,-836.83 ccw(c1369.82,-815.49) 1400,-815.49 ccw(c1430.18,-815.49) R18.2@1408.84,-836.83 ; R13.1@1391.16,-774.51 cw(c1369.82,-795.85) 1400,-795.85 cw(c1430.18,-795.85) R13.1@1408.84,-774.51 ; R13.1@1400,-760.67 R18.2@1400,-850.67 C10.1@1400,-940.67 1441,-940.67 1453,-952.67 1453,-1029.67 1469,-1045.67 U2.6@1530,-1045.67 ; C10.1@1408.84,-949.51 cw(c1430.18,-970.85) 1430.18,-940.67 cw(c1430.18,-910.49) C10.1@1408.84,-931.83
NetC11_1: C11.1 R14.1 R17.2 U3.2 | length 554.6
  Top Layer w15: U3.2@2475,-1085.67 R17.2@2607.5,-1085.67 ; R17.2@2598.66,-1099.51 cw(c2577.32,-1120.85) 2607.5,-1120.85 cw(c2637.68,-1120.85) R17.2@2616.34,-1099.51 ; R17.2@2598.66,-1094.51 ccw(c2577.32,-1115.85) 2577.32,-1085.67 ccw(c2577.32,-1055.49) R17.2@2598.66,-1076.83 ; R17.2@2598.66,-1071.83 ccw(c2577.07,-1050.24) 2607.6,-1050.24 ; C11.1@2598.77,-1161.83 ccw(c2577.68,-1140.74) 2607.5,-1140.74 ; R14.1@2598.77,-1004.51 cw(c2577.43,-1025.85) 2607.6,-1025.85 cw(c2637.78,-1025.85) R14.1@2616.44,-1004.51 ; 2607.5,-1140.24 ccw(c2638.03,-1140.24) C11.1@2616.44,-1161.83 ; C11.1@2607.6,-1175.67 2607.5,-1175.57 R17.2@2607.5,-1085.67 ; 2607.6,-1050.74 ccw(c2637.43,-1050.74) R17.2@2616.34,-1071.83 ; R14.1@2607.6,-990.67 2607.6,-1085.57 R17.2@2607.5,-1085.67
NetC12_1: C12.1 R15.1 R19.2 U3.6 | length 670.8
  Top Layer w15: C12.1@2106.16,-916.83 ccw(c2084.82,-895.49) 2115,-895.49 ccw(c2145.18,-895.49) C12.1@2123.84,-916.83 ; 2115,-899.99 cw(c2179.32,-899.99) R19.2@2133.84,-854.51 ; R19.2@2115,-863.78 cw(c2143.11,-863.78) R19.2@2123.23,-843.9 ; R19.2@2116.16,-826.83 ccw(c2094.82,-805.49) 2125,-805.49 ccw(c2155.18,-805.49) R19.2@2133.84,-826.83 ; R15.1@2116.16,-764.51 cw(c2094.82,-785.85) 2125,-785.85 cw(c2155.18,-785.85) R15.1@2133.84,-764.51 ; C12.1@2123.84,-939.51 cw(c2145.18,-960.85) 2145.18,-930.67 cw(c2145.18,-900.49) C12.1@2123.84,-921.83 ; R15.1@2125,-750.67 R19.2@2125,-840.67 2115,-850.67 C12.1@2115,-930.67 2150,-930.67 2170,-950.67 2170,-1020.67 2185,-1035.67 U3.6@2255,-1035.67
NetC27_2: C27.2 R58.1 | length 74.5
  Top Layer w30: C27.2@2420.5,-3945.67 R58.1@2495,-3945.67
NetD1_2: D1.2 R5.1 | length 249.2
  Top Layer w15: D1.2@1297.63,-4078.3 ccw(c1265.34,-4046.01) 1311,-4046.01 ; R5.1@1302.16,-3964.51 cw(c1280.82,-3985.85) 1311,-3985.85 cw(c1341.18,-3985.85) R5.1@1319.84,-3964.51 ; D1.2@1310,-4090.67 1311,-4089.67 R5.1@1311,-3955.67 ; 1311,-4050.83 ccw(c1349.84,-4050.83) D1.2@1322.37,-4078.3
NetD2_2: D2.2 R6.1 | length 249.2
  Top Layer w15: D2.2@1297.63,-3603.3 ccw(c1265.34,-3571.01) 1311,-3571.01 ; R6.1@1302.16,-3489.51 cw(c1280.82,-3510.85) 1311,-3510.85 cw(c1341.18,-3510.85) R6.1@1319.84,-3489.51 ; D2.2@1310,-3615.67 1311,-3614.67 R6.1@1311,-3480.67 ; 1311,-3575.83 ccw(c1349.84,-3575.83) D2.2@1322.37,-3603.3
NetD3_2: D3.2 R7.1 | length 246.7
  Top Layer w15: D3.2@1297.63,-3128.3 ccw(c1265.34,-3096.01) 1311,-3096.01 ; R7.1@1302.16,-3017.01 cw(c1280.82,-3038.35) 1311,-3038.35 cw(c1341.18,-3038.35) R7.1@1319.84,-3017.01 ; D3.2@1310,-3140.67 1311,-3139.67 R7.1@1311,-3008.17 ; 1311,-3100.83 ccw(c1349.84,-3100.83) D3.2@1322.37,-3128.3
NetD4_2: D4.2 R68.2 | length 175.7
  Bottom Layer w20: D4.2@2636,-1137.56 2728.11,-1137.56 R68.2@2730,-1135.67 ; D4.2@2646.61,-1148.17 cw(c2672.21,-1173.78) 2672.21,-1137.56 cw(c2672.21,-1101.35) D4.2@2646.61,-1126.96 ; 2696.29,-1137.56 ccw(c2696.29,-1106.96) R68.2@2717.93,-1128.6
NetD5_K: D5.K F5.2 R70.2 R71.2 U9.7 | length 795.6
  Bottom Layer w20: D5.K@2297.03,-989.99 cw(c2269.44,-1023.57) 2312.9,-1023.57 ; D5.K@2312.9,-970.67 2312.9,-1023.57 ; F5.2@2312.9,-859.6 2420,-859.6 ; D5.K@2328.77,-989.99 ccw(c2356.36,-1023.57) 2312.9,-1023.57 ; F5.2@2365.84,-869.23 cw(c2389.09,-892.49) 2389.09,-859.6 cw(c2389.09,-826.71) F5.2@2365.84,-849.97 ; 2397.32,-1107.99 ccw(c2440,-1065.31) R70.2@2440,-1125.67 ; R71.2@2435.16,-737.43 cw(c2381.36,-747.03) 2420,-785.67 ; R70.2@2445,-1135.67 2425,-1135.67 2312.9,-1023.57 ; 2447.1,-758.57 ccw(c2427.35,-738.82) R71.2@2454.84,-733.91 ; R71.2@2450,-735.67 2450,-755.67 2420,-785.67 ; U9.7@2485,-860.67 2483.93,-859.6 2420,-859.6 ; 2420,-859.6 2420,-785.67
NetD6_K: D6.K F6.2 R69.1 R70.1 U9.6 | length 1054.7
  Bottom Layer w20: D6.K@2120.3,-952.92 ccw(c2078.41,-910.67) 2137.9,-910.67 ; F6.2@2128.27,-869.23 cw(c2105.02,-892.48) 2137.9,-892.48 cw(c2170.79,-892.49) F6.2@2147.53,-869.23 ; D6.K@2137.9,-970.67 2137.9,-910.67 ; F6.2@2137.9,-859.6 2137.9,-910.67 ; D6.K@2155.5,-952.92 cw(c2197.39,-910.67) 2137.9,-910.67 ; 2420,-1026.53 ccw(c2464.14,-1026.53) R70.1@2432.93,-1057.74 ; 2420,-978.24 ccw(c2512.43,-978.24) R70.1@2447.07,-1043.6 ; R70.1@2430,-1050.48 ccw(c2395.84,-1049.83) 2420,-1025.67 ; R70.1@2457.07,-1057.74 cw(c2474.14,-1074.81) 2474.14,-1050.67 cw(c2474.14,-1026.53) R70.1@2457.07,-1043.6 ; U9.6@2485,-910.67 2420,-910.67 ; R69.1@2527.93,-1057.74 ccw(c2510.86,-1074.81) 2510.86,-1050.67 ccw(c2510.86,-1026.53) R69.1@2527.93,-1043.6 ; R69.1@2535,-1050.67 R70.1@2445,-1050.67 2420,-1025.67 ; 2137.9,-910.67 2420,-910.67 ; 2420,-1025.67 2420,-910.67
NetD7_1: D7.1 R100.2 | length 80
  Top Layer w30: R100.2@2260,-4130.67 D7.1@2340,-4130.67
NetD8_1: D8.1 R101.2 | length 114.4
  Top Layer w30: R101.2@2260,-4215.67 2335,-4215.67 D8.1@2340,-4220.67 ; 2303.79,-4215.67 cw(c2303.79,-4256.88) D8.1@2332.93,-4227.74
NetF1_2: F1.2 S9.1 | length 1402.4
  Top Layer w15: F1.2@1529.49,-1765.67 1580,-1765.67 1600,-1745.67 2260,-1745.67 2300,-1785.67 2300,-2207.15 S9.1@2255.22,-2251.93 ; F1.2@1540.89,-1777.07 cw(c1568.41,-1804.59) 1568.41,-1765.67 cw(c1568.41,-1726.75) F1.2@1540.89,-1754.27 ; S9.1@2255.22,-2235.81 ccw(c2255.22,-2196.89) 2282.75,-2224.41 ccw(c2310.27,-2251.93) S9.1@2271.35,-2251.93
NetF2_2: F2.2 S10.1 | length 1792.3
  Top Layer w15: F2.2@1529.49,-1625.67 1600,-1625.67 ; F2.2@1530.37,-1644.67 cw(c1569.28,-1675.01) 1569.28,-1625.67 ; F2.2@1542.2,-1653.89 cw(c1600,-1698.96) 1600,-1625.67 ; S10.1@2527.84,-2251.93 2570,-2209.77 2570,-1735.67 2545,-1710.67 1685,-1710.67 1600,-1625.67 ; S10.1@2527.84,-2235.81 ccw(c2527.84,-2196.89) 2555.36,-2224.41 ccw(c2582.88,-2251.93) S10.1@2543.96,-2251.93
NetF3_2: F3.2 S11.1 | length 465.8
  Top Layer w15: F3.2@1530,-2095.67 1640,-2095.67 1665,-2120.67 1665,-2230.67 ; F3.2@1541.4,-2107.07 cw(c1568.92,-2134.59) 1568.92,-2095.67 cw(c1568.92,-2056.75) F3.2@1541.4,-2084.27 ; 1680.1,-2245.77 ccw(c1698.47,-2227.4) S11.1@1709.52,-2250.91 ; S11.1@1695.01,-2257.87 ccw(c1686.26,-2261.35) 1686.26,-2251.93 ; S11.1@1695.01,-2245.98 cw(c1686.26,-2242.51) 1686.26,-2251.93 ; S11.1@1703.14,-2237.34 cw(c1688.82,-2206.85) 1665,-2230.67 ; S11.1@1710,-2251.93 1686.26,-2251.93 ; 1665,-2230.67 1686.26,-2251.93
NetF4_2: F4.2 S12.1 | length 1209.7
  Top Layer w15: F4.2@1529.49,-1930.67 1585,-1930.67 1615,-1900.67 1615,-1805.67 1640,-1780.67 2000,-1780.67 2025,-1805.67 2025,-2209.54 S12.1@1982.61,-2251.93 ; F4.2@1540.89,-1942.07 cw(c1568.41,-1969.59) 1568.41,-1930.67 cw(c1568.41,-1891.75) F4.2@1540.89,-1919.27 ; S12.1@1982.61,-2235.81 ccw(c1982.61,-2196.89) 2010.13,-2224.41 ccw(c2037.66,-2251.93) S12.1@1998.73,-2251.93
NetOP1_1: OP1.1 R31.2 | length 588.9
  Bottom Layer w15: R31.2@1033.66,-2749.08 cw(c1012.32,-2770.42) 1042.5,-2770.42 cw(c1072.68,-2770.42) R31.2@1051.34,-2749.08 ; R31.2@1042.5,-2735.24 1042.5,-2808.17 1085,-2850.67 OP1.1@1465,-2850.67 ; OP1.1@1434.7,-2855.97 ccw(c1421.89,-2868.78) 1421.89,-2850.67 ccw(c1421.89,-2832.56) OP1.1@1434.7,-2845.37
NetOP1_3: OP1.3 R28.2 | length 650.3
  Bottom Layer w15: R28.2@1042.5,-2560.67 1130,-2560.67 1150,-2580.67 1150,-2705.67 1195,-2750.67 OP1.3@1465,-2750.67 ; R28.2@1051.34,-2569.51 cw(c1072.68,-2590.85) 1072.68,-2560.67 cw(c1072.68,-2530.49) R28.2@1051.34,-2551.83 ; OP1.3@1434.7,-2755.97 ccw(c1421.89,-2768.78) 1421.89,-2750.67 ccw(c1421.89,-2732.56) OP1.3@1434.7,-2745.37
NetOP1_5: OP1.5 R29.2 | length 730.9
  Bottom Layer w15: R29.2@1042.5,-2386.1 1180.43,-2386.1 1200,-2405.67 1200,-2615.67 1235,-2650.67 OP1.5@1465,-2650.67 ; R29.2@1051.34,-2394.94 cw(c1072.68,-2416.27) 1072.68,-2386.1 cw(c1072.68,-2355.92) R29.2@1051.34,-2377.26 ; OP1.5@1434.7,-2655.97 ccw(c1421.89,-2668.78) 1421.89,-2650.67 ccw(c1421.89,-2632.56) OP1.5@1434.7,-2645.37
NetOP1_7: OP1.7 R30.2 | length 803.4
  Bottom Layer w15: R30.2@1042.5,-2211.52 1221.78,-2211.52 1250.93,-2240.67 1250.93,-2521.6 1280,-2550.67 OP1.7@1465,-2550.67 ; R30.2@1051.34,-2220.36 cw(c1072.68,-2241.7) 1072.68,-2211.52 cw(c1072.68,-2181.35) R30.2@1051.34,-2202.69 ; OP1.7@1434.7,-2555.97 ccw(c1421.89,-2568.78) 1421.89,-2550.67 ccw(c1421.89,-2532.56) OP1.7@1434.7,-2545.37
NetQ1_1: Q1.1 R40.1 U4.5 | length 839.6
  Bottom Layer w15: R40.1@1432.5,-1070.67 1432.5,-1058.17 1470,-1020.67 1595,-1020.67 1610,-1005.67 1610,-845.67 1620,-835.67 U4.5@1670,-835.67 1770,-835.67 1780,-845.67 1900,-845.67 ; R40.1@1445,-1065.67 cw(c1493.28,-1065.67) 1459.14,-1031.53 ; Q1.1@1907.86,-812.98 cw(c1877.23,-822.9) 1900,-845.67 ; Q1.1@1909.7,-815.97 cw(c1896.89,-828.78) 1915,-828.78 cw(c1933.11,-828.78) Q1.1@1920.3,-815.97 ; Q1.1@1915,-805.67 1915,-830.67 1900,-845.67 ; 1917.33,-828.34 ccw(c1903.41,-814.42) Q1.1@1922.14,-808.36
NetQ1_2: Q1.2 U4.1 | length 564.4
  Bottom Layer w15: U4.1@1450,-985.67 1565,-985.67 1585,-965.67 1585,-835.31 1614.64,-805.67 Q1.2@1835,-805.67 ; Q1.2@1829.7,-810.97 ccw(c1816.89,-823.78) 1816.89,-805.67 ccw(c1816.89,-787.56) Q1.2@1829.7,-800.37
NetQ1_3: Q1.3 R50.2 U4.2 | length 719.7
  Bottom Layer w15: U4.2@1450,-935.67 1540,-935.67 1560,-915.67 1560,-824.96 1590,-794.96 R50.2@1590,-755.67 1640,-705.67 Q1.3@1875,-705.67 ; R50.2@1581.16,-769.51 cw(c1559.82,-790.85) 1590,-790.85 cw(c1620.18,-790.85) R50.2@1598.84,-769.51 ; R50.2@1590,-738.17 ccw(c1590,-695.92) 1619.88,-725.79 ; R50.2@1602.5,-750.67 cw(c1620.6,-750.67) R50.2@1607.8,-737.87 ; Q1.3@1869.7,-710.97 ccw(c1856.89,-723.78) 1856.89,-705.67 ccw(c1856.89,-687.56) Q1.3@1869.7,-700.37